# EAGLE board Control PCB v46 (EAGLE 9.7.0)
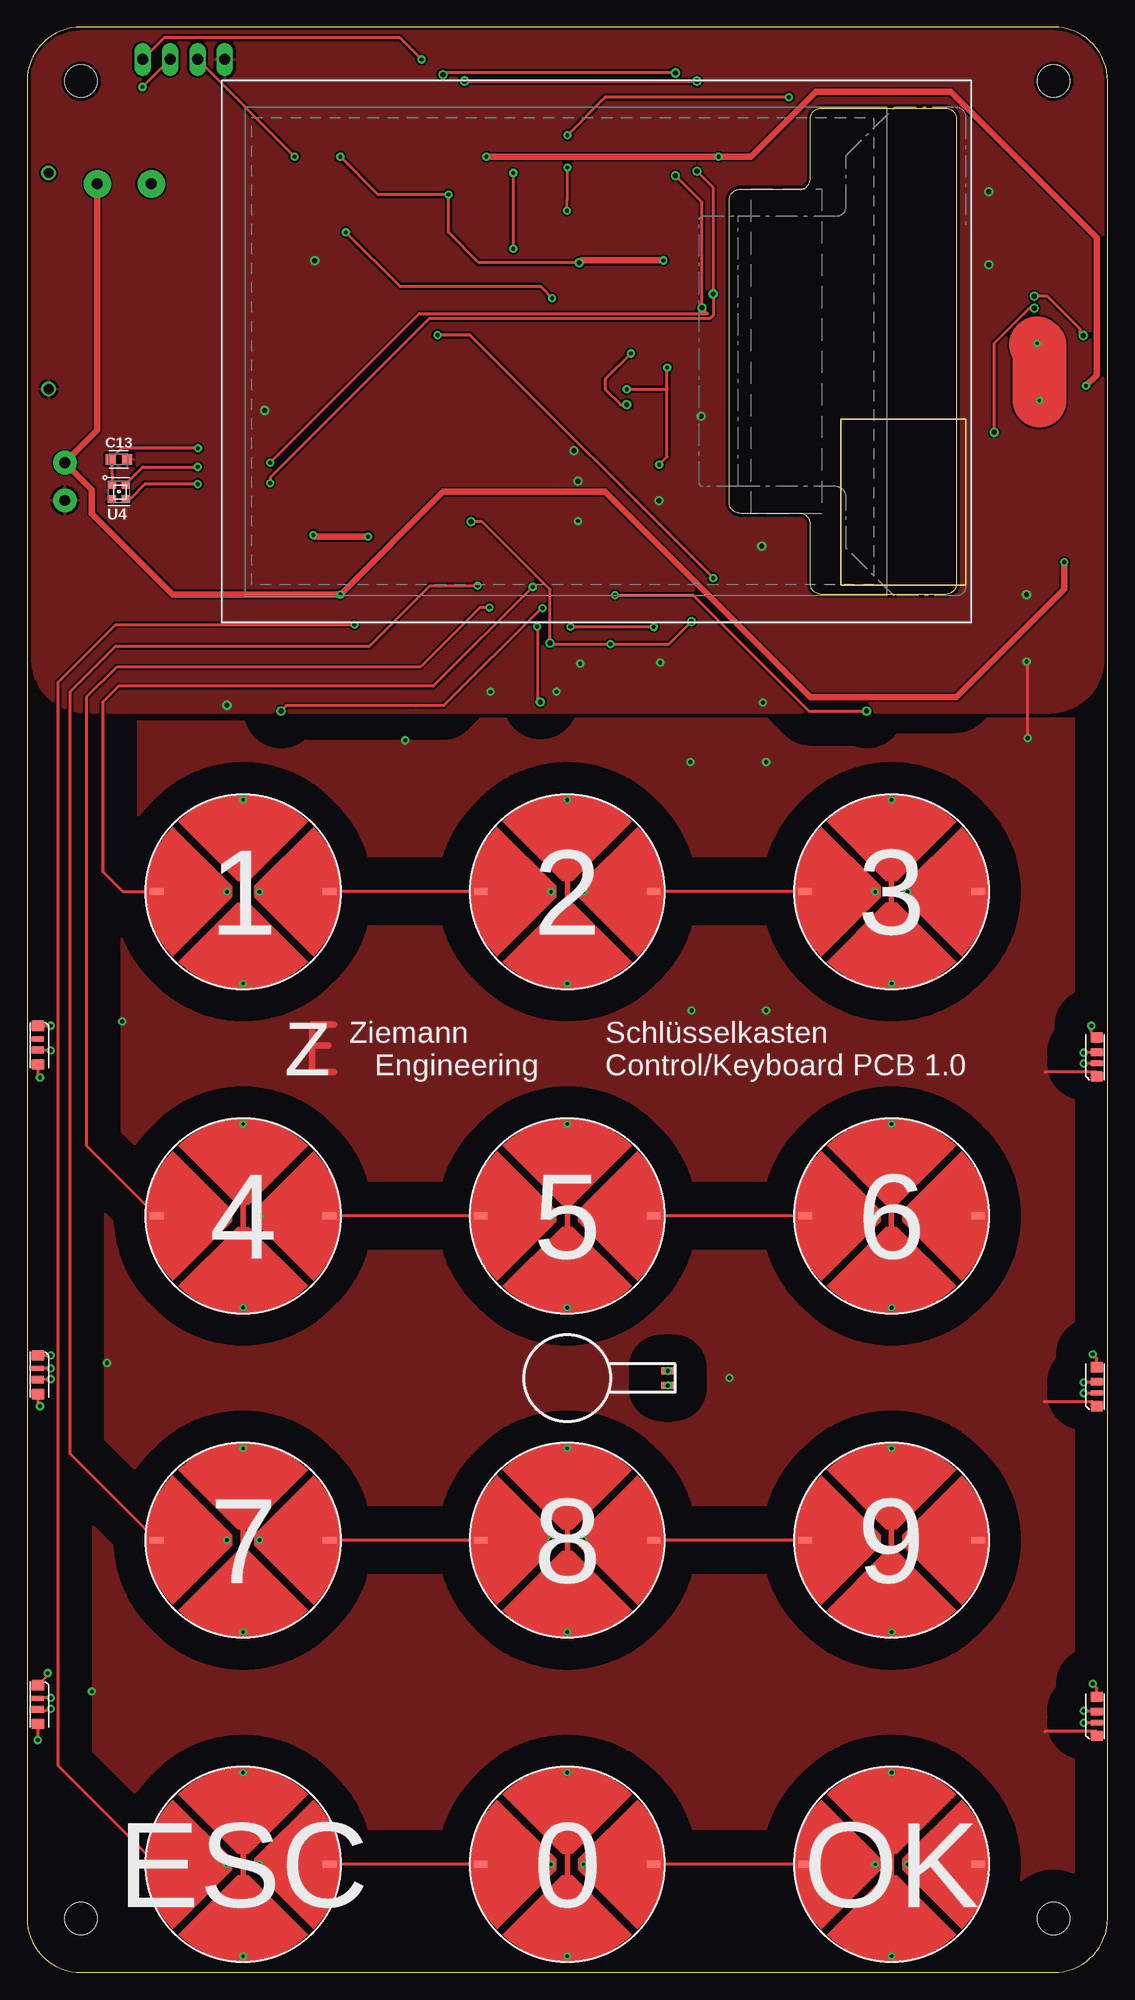
[diagram p0: board, top side]
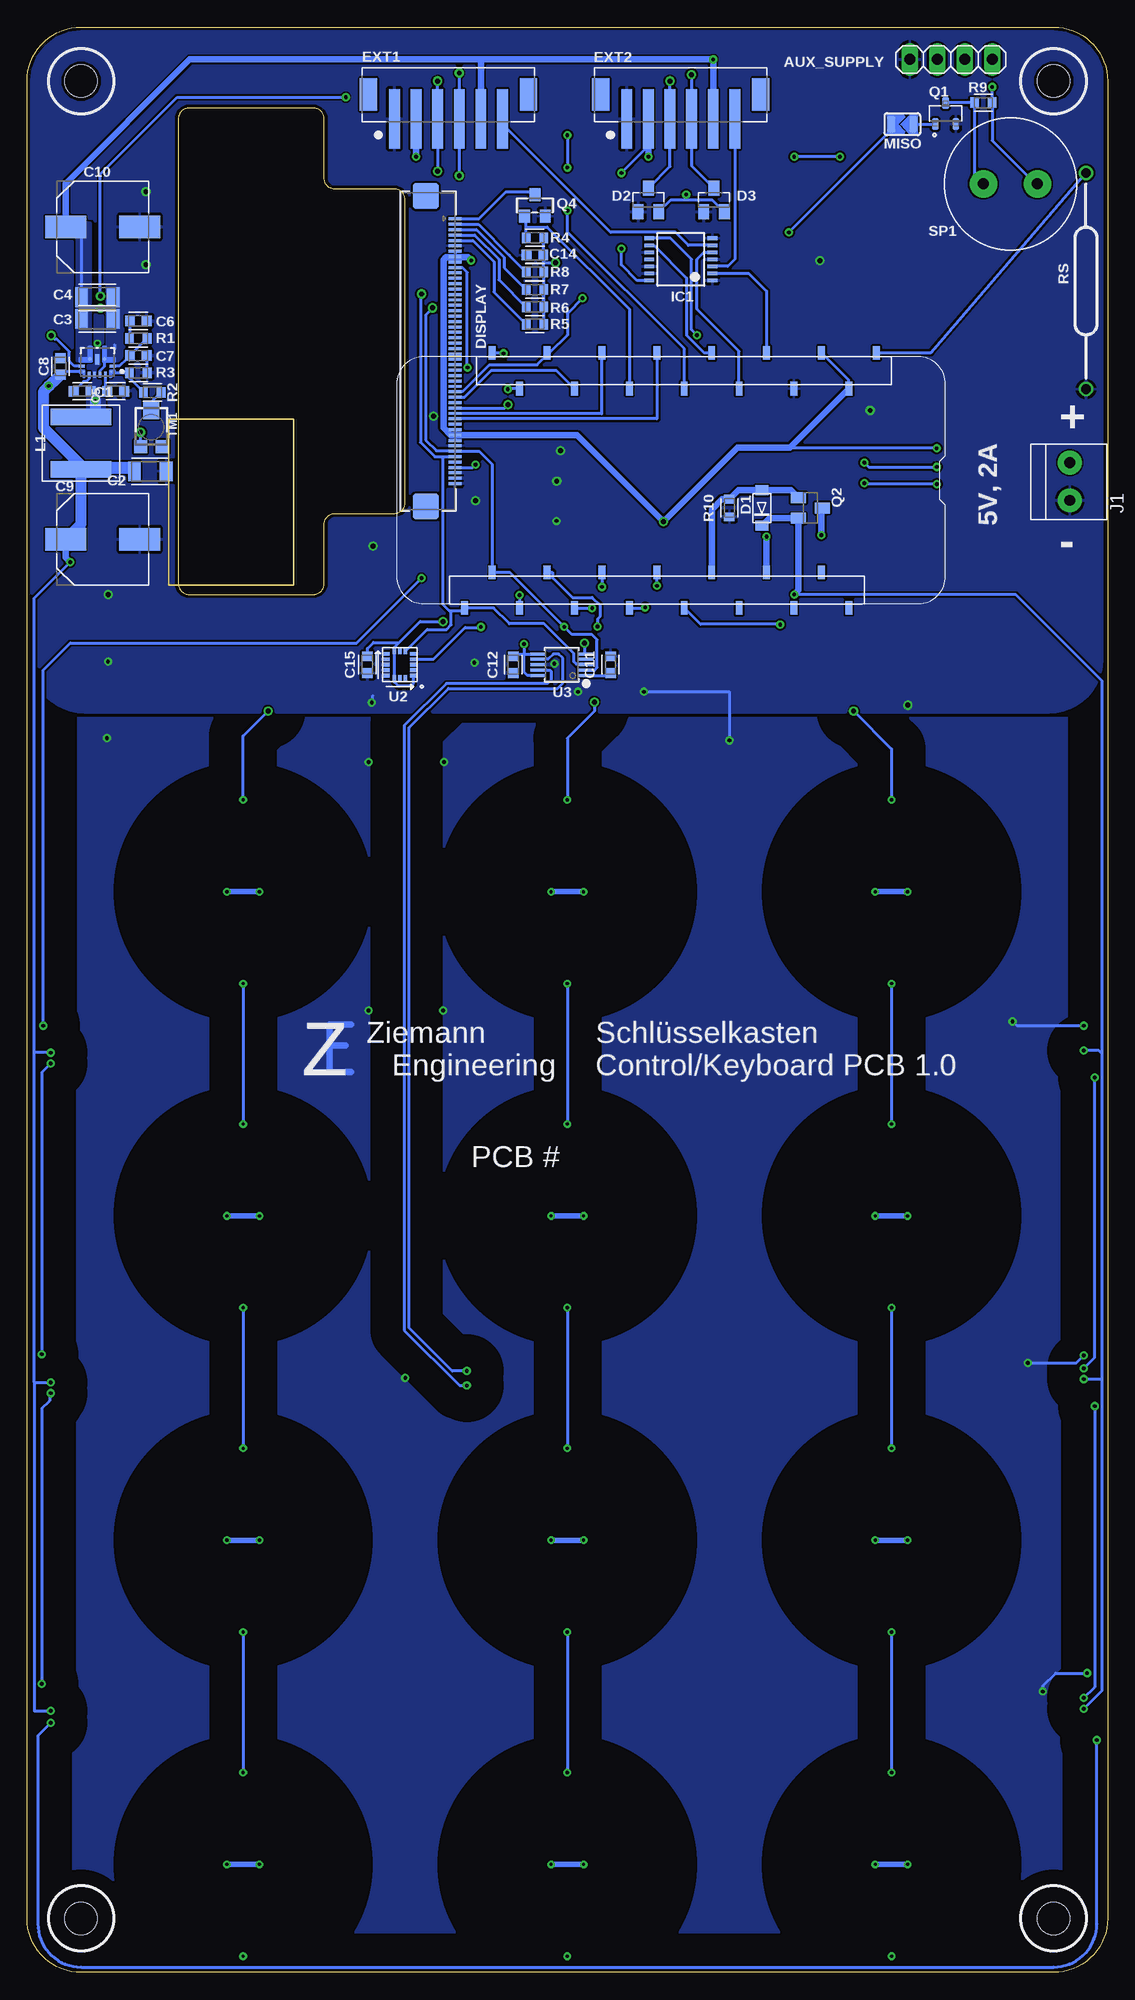
[diagram p1: board, bottom side, seen from below]

Size 100 x 180 mm. Coordinates in mm from the lower left corner, seen from the top.
Outline: 0,175 0,5 arc90 5,0 95,0 arc90 100,5 100,175 arc90 95,180 5,180 arc90 0,175
Outline: 65,136 65,164 arc-90 66,165 71.5,165 arc90 72.5,166 72.5,171.5 arc-90 73.5,172.5 85,172.5 arc-90 86,171.5 86,128.5 arc-90 85,127.5 73.5,127.5 arc-90 72.5,128.5 72.5,134 arc90 71.5,135 66,135 arc-90 65,136
Copper layers (1*16): Top / Bottom
Stack-up Default Layer Stack: Top User Defined 0.035mm / Dielectric-1 User Defined 1.5mm / Bottom User Defined 0.035mm
Design rules "aisler_2_layer_simple *": minimum track width 0.2mm, minimum drill 0.3mm, track to track 0.175mm, track to pad 0.175mm, pad to pad 0.175mm, via to via 0.175mm, smd to smd 0.175mm, copper to edge 0.3mm, drill to drill 0.25mm, minimum pad ring 0.2mm, minimum via ring 0.2mm, stop-mask expansion 0mil, vias tented up to drill 0mil, thermal gap 10mil
Holes 3 mm at 95,175 95,5 5,5 5,175
bRestrict: area 76,96 to 84,104; area 46,96 to 54,104; area 16,96 to 24,104; area 76,66 to 84,74; area 46,66 to 54,74; area 16,66 to 24,74; area 76,36 to 84,44; area 46,36 to 54,44; area 16,36 to 24,44; area 76,6 to 84,14; area 46,6 to 54,14; area 16,6 to 24,14

## Footprints (pad centres in the part's own frame; a part is rotated, then mirrored left to right if it is on the bottom)
TOUCH_MATRIX_BUTTON = smd 1.27 x 0.635: A -8,0; A' 8,0 | drill 0.3 pad 0.254: B 0,8.5; B' 0,-8.5; B'' -1.5,0; B''' 1.5,0
1X04 = drill 1.016 long: 1 -3.81,0; 2 -1.27,0; 3 1.27,0; 4 3.81,0
CAPC1608X85 = smd 0.921 x 0.97: 1 -0.775,0; 2 0.775,0
CAPC3216X135 = smd 1.165 x 1.815: 1 -1.475,0; 2 1.475,0
CAPAE830X1050N = smd 3.764 x 2.115: 1 -3.426,0; 2 3.426,0
SOD-123FL = smd 0.91 x 1.22: A 1.637,0; C -1.637,0
SOT23 = smd 1 x 1.4: 1 -0.95,-1.1; 2 0.95,-1.1; 3 0,1.1
TFT_2.83IN_240X320_50PIN = smd 0.275 x 1.2 bottom: 1 12.25,-10.39; 2 11.75,-10.39; 3 11.25,-10.39; 4 10.75,-10.39; 5 10.25,-10.39; 6 9.75,-10.39; 7 9.25,-10.39; 8 8.75,-10.39; 9 8.25,-10.39; 10 7.75,-10.39; 11 7.25,-10.39; 12 6.75,-10.39; 13 6.25,-10.39; 14 5.75,-10.39; 15 5.25,-10.39; 16 4.75,-10.39; 17 4.25,-10.39; 18 3.75,-10.39; 19 3.25,-10.39; 20 2.75,-10.39; 21 2.25,-10.39; 22 1.75,-10.39; 23 1.25,-10.39; 24 0.75,-10.39; 25 0.25,-10.39; 26 -0.25,-10.39; 27 -0.75,-10.39; 28 -1.25,-10.39; 29 -1.75,-10.39; 30 -2.25,-10.39; 31 -2.75,-10.39; 32 -3.25,-10.39; 33 -3.75,-10.39; 34 -4.25,-10.39; 35 -4.75,-10.39; 36 -5.25,-10.39; 37 -5.75,-10.39; 38 -6.25,-10.39; 39 -6.75,-10.39; 40 -7.25,-10.39; 41 -7.75,-10.39; 42 -8.25,-10.39; 43 -8.75,-10.39; 44 -9.25,-10.39; 45 -9.75,-10.39; 46 -10.25,-10.39; 47 -10.75,-10.39; 48 -11.25,-10.39; 49 -11.75,-10.39; 50 -12.25,-10.39 | smd 2.4 x 2.4 bottom: PAD1 14.35,-13.09; PAD2 -14.35,-13.09
JST_B6B-PH-SM4-TB(LF)(SN) = smd 1 x 5.5: 1 -5,0; 2 -3,0; 3 -1,0; 4 1,0; 5 3,0; 6 5,0 | smd 1.6 x 3: P1 -7.4,2.25; P2 7.4,2.25
TSSOP14 = smd 0.35 x 0.9: 1 -1.95,-2.925; 2 -1.3,-2.925; 3 -0.65,-2.925; 4 0,-2.925; 5 0.65,-2.925; 6 1.3,-2.925; 7 1.95,-2.925; 8 1.95,2.925; 9 1.3,2.925; 10 0.65,2.925; 11 0,2.925; 12 -0.65,2.925; 13 -1.3,2.925; 14 -1.95,2.925
1X2-3.5MM = drill 1 pad 2.184: 1 1.8,0; 2 -1.7,0
INDM7269X280 = smd 1.55 x 5.6: 1 -2.438,0; 2 2.438,0
4020 = smd 1 x 1.2: DIN 0,0; GND 3.6,0 | smd 0.45 x 1.2: DOUT 2.375,0 | smd 0.7 x 1.2: VDD 1.35,0
FEATHERWING_SMD = smd 0.635 x 1.27: P$1 6.4,-0.35; P$2 8.94,2.95; P$3 11.48,-0.35; P$4 14.02,2.95; P$5 16.56,-0.35; P$6 19.1,2.95; P$7 21.64,-0.35; P$8 24.18,2.95; P$9 26.72,-0.35; P$10 29.26,2.95; P$11 31.8,-0.35; P$12 34.34,2.95; P$13 36.88,-0.35; P$14 39.42,2.95; P$15 41.96,-0.35; P$17 44.5,23.25; P$18 41.96,19.95; P$19 39.42,23.25; P$20 36.88,19.95; P$21 34.34,23.25; P$22 31.8,19.95; P$23 29.26,23.25; P$24 26.72,19.95; P$25 24.18,23.25; P$26 21.64,19.95; P$27 19.1,23.25; P$28 16.56,19.95; P$29 14.02,23.25; P$30 11.48,19.95; P$31 8.94,23.25
SOLDERJUMPER_ARROW_NOPASTE = smd 0.762 x 1.524: 1 -1.016,0; 2 1.016,0
SOT23-3 = smd 0.62 x 1.1: 1 -0.95,-0.975; 2 0.95,-0.975; 3 0,0.975
SOT23-WIDE = smd 1 x 1.2: 1 -0.95,-1; 2 0.95,-1; 3 0,1
RESC1608X60 = smd 0.799 x 0.974: 1 -0.815,0; 2 0.815,0
AXIAL_20MM = drill 0.9: P$1 -10,0; P$2 10,0
PS12 = drill 1 pad 2.54: P$1 -2.5,0; P$2 2.5,0
TC33X = smd 1.2 x 1.2: 1 -1,-1.825; 3 1,-1.825 | smd 1.5 x 1.6: 2 0,1.5
RQQ0011A-MFG = smd 0.241 x 0.241: 1 -1.269,0.894; 7 1.269,0.894 | smd 0.55 x 0.25: 2 -1.425,0.375; 6 1.425,0.375 | smd 0.37 x 0.37: 3 -0.684,-0.278; 5 0.684,-0.278 | smd 0.4 x 1: 4 0,-0.25 | smd 0.25 x 0.55: 8 0.75,1.175; 9 0.25,1.175; 10 -0.25,1.175; 11 -0.75,1.175
LGA-16 = smd 0.52 x 0.35: 1 -1.225,1; 2 -1.225,0.5; 3 -1.225,0; 4 -1.225,-0.5; 5 -1.225,-1; 9 1.225,-1; 10 1.225,-0.5; 11 1.225,0; 12 1.225,0.5; 13 1.225,1 | smd 0.35 x 0.52: 6 -0.5,-1.225; 7 0,-1.225; 8 0.5,-1.225; 14 0.5,1.225; 15 0,1.225; 16 -0.5,1.225
PSOP10 = smd 0.28 x 1.45: 1 -1,-2.2; 2 -0.5,-2.2; 3 0,-2.2; 4 0.5,-2.2; 5 1,-2.2; 6 1,2.2; 7 0.5,2.2; 8 0,2.2; 9 -0.5,2.2; 10 -1,2.2
LTR-329 = smd 0.7 x 0.75: 1 -0.6,0.675; 2 -0.6,-0.675; 3 0.6,-0.675; 4 0.6,0.675
VG0832014L = smd 0.655 x 1.2: P$1 -0.672,-9.3; P$2 0.672,-9.3

## Placement (x,y rotation side)
0  TOUCH_MATRIX_BUTTON  [TOUCH_MATRIX_BUTTON]  50,10 0 top
1  TOUCH_MATRIX_BUTTON  [TOUCH_MATRIX_BUTTON]  20,100 0 top
2  TOUCH_MATRIX_BUTTON  [TOUCH_MATRIX_BUTTON]  50,100 0 top
3  TOUCH_MATRIX_BUTTON  [TOUCH_MATRIX_BUTTON]  80,100 0 top
4  TOUCH_MATRIX_BUTTON  [TOUCH_MATRIX_BUTTON]  20,70 0 top
5  TOUCH_MATRIX_BUTTON  [TOUCH_MATRIX_BUTTON]  50,70 0 top
6  TOUCH_MATRIX_BUTTON  [TOUCH_MATRIX_BUTTON]  80,70 0 top
7  TOUCH_MATRIX_BUTTON  [TOUCH_MATRIX_BUTTON]  20,40 0 top
8  TOUCH_MATRIX_BUTTON  [TOUCH_MATRIX_BUTTON]  50,40 0 top
9  TOUCH_MATRIX_BUTTON  [TOUCH_MATRIX_BUTTON]  80,40 0 top
AUX_SUPPLY  PINHD-1X4  [1X04]  14.5,177 180 bottom
C1  100n  [CAPC1608X85]  94.9,146.3 0 bottom
C2  10u  [CAPC3216X135]  88.6,138.9 0 bottom
C3  10u  [CAPC3216X135]  93.5,153 0 bottom
C4  10u  [CAPC3216X135]  93.5,155 0 bottom
C5  2.2u  [CAPC1608X85]  91.8,146.3 180 bottom
C6  39n  [CAPC1608X85]  89.7,152.8 180 bottom
C7  82p  [CAPC1608X85]  89.7,149.6 180 bottom
C8  100n  [CAPC1608X85]  96.9,148.6 270 bottom
C9  [CAPAE830X1050N]  93,132.6 0 bottom
C10  [CAPAE830X1050N]  93,161.5 0 bottom
C11  1u  [CAPC1608X85]  46,121 90 bottom
C12  1u  [CAPC1608X85]  55,121 90 bottom
C13  100n  [CAPC1608X85]  8.5,140 180 top
C14  100n  [CAPC1608X85]  53,158.9 0 bottom
C15  100n  [CAPC1608X85]  68.5,121 90 bottom
D1  [SOD-123FL]  32,135.5 90 bottom
D2  BAT54S  [SOT23]  42.5,164 0 bottom
D3  BAT54S  [SOT23]  36.42,164 0 bottom
DISPLAY  2.8" CTP ILI9341  [TFT_2.83IN_240X320_50PIN]  50,150 90 top
ESC  TOUCH_MATRIX_BUTTON  [TOUCH_MATRIX_BUTTON]  20,10 0 top
EXT1  B6B-PH-SM4-TB(LF)(SN)  [JST_B6B-PH-SM4-TB(LF)(SN)]  61,171.5 0 bottom
EXT2  B6B-PH-SM4-TB(LF)(SN)  [JST_B6B-PH-SM4-TB(LF)(SN)]  39.5,171.5 0 bottom
IC1  74ABT125PW  [TSSOP14]  39.5,158.5 90 bottom
J1  1X2-3.5MM  [1X2-3.5MM]  3.5,138 270 bottom
L1  [INDM7269X280]  95,141.5 90 bottom
LED1  SK6812  [4020]  99,86.5 270 top
LED2  SK6812  [4020]  99,56 270 top
LED3  SK6812  [4020]  99,25.5 270 top
LED4  SK6812  [4020]  1,23 90 top
LED5  SK6812  [4020]  1,53.5 90 top
LED6  SK6812  [4020]  1,84 90 top
MCU  FEATHERSMD  [FEATHERWING_SMD]  15,149.5 180 bottom
MISO  [SOLDERJUMPER_ARROW_NOPASTE]  19,171 180 bottom
OK  TOUCH_MATRIX_BUTTON  [TOUCH_MATRIX_BUTTON]  80,10 0 top
Q1  MOSFET-N  [SOT23-3]  15,172 0 bottom
Q2  PMOSFET  [SOT23]  27.5,135.5 270 bottom
Q4  BSS138  [SOT23-WIDE]  53,163.5 0 bottom
R1  36k  [RESC1608X60]  89.7,151.2 0 bottom
R2  91k  [RESC1608X60]  88.4,146.2 0 bottom
R3  10k  [RESC1608X60]  89.7,148 180 bottom
R4  10k  [RESC1608X60]  53,160.5 0 bottom
R5  10  [RESC1608X60]  53,152.5 0 bottom
R6  10  [RESC1608X60]  53,154.1 0 bottom
R7  10  [RESC1608X60]  53,155.7 0 bottom
R8  10  [RESC1608X60]  53,157.33 0 bottom
R9  1k  [RESC1608X60]  11.5,173 0 bottom
R10  100k  [RESC1608X60]  35,135.5 90 bottom
RS  REEDSWITCH  [AXIAL_20MM]  2,156.5 90 bottom
SP1  SPEAKER/PS12  [PS12]  9,165.5 180 bottom
TM1  200k  [TC33X]  88.5,143 0 bottom
U1  TPS61288RQQRRQQ0011A-MFG  [RQQ0011A-MFG]  93.5,149 180 bottom
U2  LIS3DHTR  [LGA-16]  65.5,121 180 bottom
U3  DRV2605LDGS  [PSOP10]  50.5,121 90 bottom
U4  LTR-329  [LTR-329]  8.5,137 0 top
U$2  VIBRATION_MOTOR  [VG0832014L]  50,55 90 top
U$3  [ZELOGO_NAME]  26.5,83 0 top
U$4  [ZELOGO_NAME]  71.9,83 0 bottom

## Library data of the parts
0 1-9 ESC L1 LED1-LED6 MCU OK RS U$2 U$4 = ZE PCB lib v51
AUX_SUPPLY = MAS AT PCB library; CATEGORY: CONNECTOR; SUB-CATEGORY: PIN-HEADER
C1-C15 = Capacitor; CATEGORY: Capacitor
D1 J1 SP1 = adafruit
D2 D3 = diode
DISPLAY Q4 U3 = microbuilder
EXT1 EXT2 = B6B-PH-SM4-TB_LF__SN_; MANUFACTURER: JST
IC1 = 74xx-eu
MISO = microbuilder; BOM: EXCLUDE
Q1 = MAS AT PCB library; CREATED_BY: PCBLayout.com; DIGIKEY_PART_NUMBER: 1727-2764-1-ND; MANUFACTURER: Nexperia USA Inc.; MPN: 2N7002,215; PACKAGE: SOT-23-3
Q2 = Transistor; CATEGORY: Transistor; SUB-CATEGORY: MOSFET; TYPE: P-Channel
R1-R10 = Resistor; CATEGORY: Resistor; SUB-CATEGORY: Fixed
TM1 = MAS AT PCB library v11
U1 = 2023-08-09_12-29-33_Library; COPYRIGHT: Copyright (C) 2023 Ultra Librarian. All rights reserved.; DIGI-KEY_PART_NUMBER_1: 296-TPS61288RQQRCT-ND; DIGI-KEY_PART_NUMBER_2: 296-TPS61288RQQRDKR-ND; DIGI-KEY_PART_NUMBER_3: 296-TPS61288RQQRTR-ND; MANUFACTURER_PART_NUMBER: TPS61288RQQR; MFR_NAME: Texas Instruments; REFDES: RefDes; TYPE: TYPE
U2 = MAS AT PCB library; CREATED_BY: PCBLayout.com; DIGIKEY_PN: 497-10613-2-ND; MANUFACTURER: STMicroelectronics; MPN: LIS3DHTR; PACKAGE: LGA-16
U4 = adafruit_sensor
U$3 = ZE PCB lib

## Nets
3V3: AUX_SUPPLY.3 C12.2 C13.2 C14.2 C15.2 D2.2 D3.2 DISPLAY.7 DISPLAY.8 DISPLAY.9 DISPLAY.40 DISPLAY.41 DISPLAY.42 MCU.P$2 MCU.P$3 R4.2 R5.2 R6.2 R7.2 R8.2 U2.1 U2.8 U2.14 U3.5 U3.6 U3.10 U4.1
5V: AUX_SUPPLY.2 C2.1 C8.2 C9.1 D1.C EXT1.2 EXT2.2 IC1.14 J1.2 L1.1 LED1.VDD LED2.VDD LED3.VDD LED4.VDD LED5.VDD LED6.VDD Q2.2 R9.2 SP1.P$1 U1.7
12V: AUX_SUPPLY.1 C3.1 C4.1 C10.1 EXT1.5 EXT2.5 TM1.1 U1.5
12V_EN: MCU.P$8 U1.6
ACC_INT: U2.11
GND: AUX_SUPPLY.4 C2.2 C3.2 C4.2 C5.1 C6.1 C7.1 C8.1 C9.2 C10.2 C11.2 C12.1 C13.1 C14.1 C15.1 D2.1 D3.1 DISPLAY.6 DISPLAY.43 DISPLAY.48 DISPLAY.49 DISPLAY.50 EXT1.1 EXT2.1 IC1.1 IC1.4 IC1.7 IC1.10 IC1.12 IC1.13 J1.1 LED1.GND LED2.GND LED3.GND LED4.GND LED5.GND LED6.GND MCU.P$4 Q1.2 Q4.2 R3.1 R10.1 RS.P$1 U1.3 U1.10 U2.5 U2.10 U2.12 U3.8 U4.2
IN/TRIG: U3.4
LCD_CS: DISPLAY.38 MCU.P$9
LCD_DC: DISPLAY.36 MCU.P$15
LCD_LITE: MCU.P$10 Q4.1 R4.1
LCD_RST: DISPLAY.10 DISPLAY.47 MCU.P$14
LED1: IC1.2 MCU.P$5
LED1_5V: EXT2.6 IC1.3
LED2: IC1.5 MCU.P$6
LED2_5V: EXT1.6 IC1.6
LED3: IC1.9 MCU.P$7
LED3_5V: IC1.8 LED1.DIN
MCU_RESET: MCU.P$1 RS.P$2
MISO: DISPLAY.33 MCU.P$13 MISO.2
MOSI: DISPLAY.34 MCU.P$12
N$1: 7.A' 8.A
N$2: DISPLAY.5 R5.1
N$3: DISPLAY.2 R8.1
N$4: C1.1 U1.8
N$5: C5.2 U1.11
N$6: C6.2 R1.1
N$7: C1.2 L1.2 U1.4 U1.9
N$8: DISPLAY.3 R7.1
N$9: C7.2 R1.2 U1.2
N$10: DISPLAY.4 R6.1
N$11: R2.2 TM1.2
N$12: R2.1 R3.2 U1.1
N$13: DISPLAY.1 Q4.3
N$14: 8.A' 9.A
N$15: 4.A' 5.A
N$16: 5.A' 6.A
N$17: 4.B' 7.B
N$18: 7.B' ESC.B
N$19: 5.B' 8.B
N$20: 1.A' 2.A
N$21: 2.A' 3.A
N$22: 0.B 8.B'
N$23: 6.B' 9.B
N$24: 9.B' OK.B
N$25: 0.A ESC.A'
N$26: 0.A' OK.A
N$27: 1.B' 4.B
N$28: 2.B' 5.B
N$29: 3.B' 6.B
N$30: C11.1 U3.1
N$31: U3.9 U$2.P$1
N$32: LED1.DOUT LED2.DIN
N$33: U3.7 U$2.P$2
N$34: LED5.DOUT LED6.DIN
N$35: LED4.DOUT LED5.DIN
N$36: LED2.DOUT LED3.DIN
N$37: LED3.DOUT LED4.DIN
N$38: Q1.3 R9.1 SP1.P$2
N$39: MISO.1 Q1.1
SCK: DISPLAY.37 MCU.P$11
SCL: D3.3 DISPLAY.44 EXT1.4 EXT2.4 MCU.P$18 U2.4 U3.2 U4.4
SDA: D2.3 DISPLAY.45 EXT1.3 EXT2.3 MCU.P$17 U2.6 U3.3 U4.3
TOUCH_5: 3.B MCU.P$19
TOUCH_6: 2.B MCU.P$20
TOUCH_9: 1.B MCU.P$21
TOUCH_10: 1.A MCU.P$22
TOUCH_11: 4.A MCU.P$23
TOUCH_12: 7.A MCU.P$24
TOUCH_13: ESC.A MCU.P$25
TOUCH_IRQ: DISPLAY.46
V_BAT: MCU.P$28 Q2.3
V_BUS: D1.A MCU.P$26 Q2.1 R10.2

## Tracks (layer width: path | path; a pad name or v marks a point on that pad's centre or on a via)
3V3  (via drill 0.35, 0.45 pad 0.55)
  Top 0.3: v61.5,125 59.4,122.9 v54,122.9 48.5,122.9 v48.4,123 48.4,127.95 42.1,134.25 v41.1,134.25 | AUX_SUPPLY.3 v24.77,168 | v29,168 32.5,164.5 v39,164.5 39,161 41.8,158.2 v51.1,158.2 | v15.82,141.02 8.75,141.02 C13.2 7.9,139.82 7.9,138.62 7.9,138.5 U4.1
  Top 0.6: v51.1,158.2 51.3,158.41 v58.9,158.41
  Top 0.61: v51.1,158.2 v51.1,158.21
  Bottom 0.3: 52.19,158.2 R8.2 R7.2 | DISPLAY.7 DISPLAY.8 DISPLAY.9 | DISPLAY.40 DISPLAY.41 DISPLAY.42 | v48.4,123 48.4,122.1 U3.5 | R7.2 52.19,155.5 | C12.2 54.77,122 54,122 | 54,122 U3.6 | v54,122.9 54,122 | U3.10 53.7,120 54,120.3 54,122 | MCU.P$3 23.99,147.36 23.99,146.73 23.94,146.68 MCU.P$2 | 65.56,123.06 66,122.61 U2.8 U2.14 66,119.39 65.61,119 64.5,119 64.28,119.22 U2.1 | 65.56,123.06 63.61,125 v61.5,125 | 52.19,158.2 R4.2 | 52.19,158.2 v51.1,158.2 | R7.2 R5.2 | R6.2 R7.2 | 29.39,141.1 15.82,141.1 v15.82,141.02 | v24.77,168 v29,168 | C15.2 68.5,122.5 67.94,123.06 65.56,123.06 | C14.2 52.23,158.24 52.19,158.2 | D3.2 36.58,164 39,164 | 39,164 40.45,164 D2.2 | 39,164 v39,164.5
  Bottom 0.6: MCU.P$2 29.39,141.1 34.25,141.1 v41.1,134.25 49.1,142.25 DISPLAY.41 60.79,142.25 61.47,142.92 61.47,158.44 61.2,158.7 60.44,158.7 DISPLAY.8 60.34,158.7 59.19,158.7 v58.9,158.41
5V  (via drill 0.35)
  Top 0.3: LED4.VDD 1.54,24.21 v2.2,24.4 | v97.8,54.6 98.95,54.6 LED2.VDD | LED1.VDD 98.97,85.12 98.89,85.1 v97.8,85.1 | v97.8,24.2 98.98,24.2 LED3.VDD | v2.2,85.3 1,85.3 LED6.VDD | LED5.VDD 1.05,54.9 v2.2,54.9 | AUX_SUPPLY.2 v10.69,174.46 | v45,159.5 v45,166.5
  Top 0.6: v96,130.5 96,128 86,118 72.5,118 53.5,137 38.5,137 v29,127.5 13.5,127.5 6,135 6,137.2 J1.2 6.5,142.7 SP1.P$1 | v42.5,168 v64,168 67,168 73,174 85.5,174 99,160.5 99,147.8 v98,146.8
  Bottom 0.3: U1.7 96.62,148.11 C8.2 | C2.1 90.08,138.97 90.3,139.2 90.4,139.3 | v2.2,24.4 0.5,26.1 0.5,54.9 | 0.5,54.9 0.5,85 | 0.5,85 0.5,119.5 8.5,127.5 v29,127.5 | v96,130.5 99.33,127.17 99.33,85.1 | v97.8,85.1 99.33,85.1 | 99.33,54.6 99.33,24.2 v97.8,24.2 | 99.33,54.6 v97.8,54.6 | 99.33,54.6 99.33,85.1 | 0.5,85 0.8,85.3 v2.2,85.3 | v2.2,54.9 0.5,54.9 | SP1.P$1 6.68,165.54 6.68,165.5 10.69,169.5 R9.2 v10.69,174.46 | IC1.14 43.55,156.55 45,158 v45,159.5 | v45,166.5 42.5,169 EXT2.2
  Bottom 0.6: D1.C 31.31,134.55 Q2.2 28.6,127.9 v29,127.5 | C9.1 96.43,130.93 v96,130.5 | EXT2.2 v42.5,168 | v64,168 EXT1.2
  Bottom 1.016: C9.1 95,134.03 L1.1 94.86,139.2 90.3,139.2 | v98,146.8 97.92,146.8 C8.2 98.48,146.24 98.48,142.93 94.86,139.3 90.4,139.3
12V  (via drill 0.35, 0.45 pad 0.55)
  Top 0.3: v89.5,142.5 89.5,150.75 92.75,154 v93.21,154 | v36.5,177 34.5,179 12.69,179 AUX_SUPPLY.1
  Bottom 0.3: TM1.1 v89.5,142.5 | 95,154 v93.21,154 | C4.1 94.97,160.47 96,161.5 C10.1
  Bottom 0.6: C10.1 96.43,165.5 84.93,177 58,177 | 58,177 v36.5,177 EXT2.5 | EXT1.5 58,177
  pour Bottom (no thermals): 95.5,149 95.5,162 94,162 94,149
12V_EN  (via drill 0.35, 0.45 pad 0.55)
  Top 0.3: v93.21,155.1 94.4,155.1 97.4,152.1 97.4,151.81 v97.75,151.46 | v70.5,173.5 53.5,173.5 v50,170 | v50,167 50,164.02 49.98,164.01 v49.98,162.99
  Bottom 0.3: U1.6 95.62,148.62 96.09,149.09 96.09,149.94 97.25,151.1 97.39,151.1 v97.75,151.46 | v93.21,155.1 93.21,166.38 86.09,173.5 v70.5,173.5 | v50,170 v50,167 | MCU.P$8 39.18,150.22 49.98,161.01 v49.98,162.99
GND  (via drill 0.35, 0.45 pad 0.55)
  Top 0.3: LED1.GND 99,83.3 94.2,83.3 | LED2.GND 98.6,52.8 94.12,52.8 | LED3.GND 98.99,22.3 94.2,22.3 | LED6.GND v2.2,87.6 | LED5.GND v2.2,57.1 | v1.9,27.7 1.9,27.5 LED4.GND | v92.5,121.3 92.6,121.3 92.6,114.1
  Top 0.6: 26.4,85.75 26.4,87.7 28.4,87.7 | 26.4,85.75 26.4,83.3 28.4,83.3 | 26.4,85.75 27.9,85.75
  Bottom 0.3: R3.1 88.89,149.56 C7.1 | 91.9,150.6 91.9,150.19 | U1.10 93.22,147.85 93.22,148.21 92.82,148.62 U1.3 | C3.2 C4.2 | 36.52,118.48 36.5,118.5 | v8.8,88 8.4,87.6 v2.2,87.6 | v7.4,56.4 2.9,56.4 v2.2,57.1 | v6,26 6,26.5 4.8,27.7 v1.9,27.7 | 68,117.5 68,118.12 | v42.9,118.5 35,118.5 v35,114
  Bottom 0.6: 72,87.73 72,87.7 | 72,87.7 72,85.75 | 72,85.75 72,83.3 70,83.3 | 72,87.7 70,87.7 | 72,85.75 70.5,85.75
  other vias: 26.63,158.37 51.2,121.1 58.6,121.2 92.5,127.5 51,134.3 89,158 49,118.5 68.1,117.5 89,164.75 67.98,131.98 50.98,137.98 21.98,144.52 18.5,117.25 58.48,136.18 92.6,114.2 61.5,89 68.4,89 65,55 61.4,112 68.4,112 62.37,144 50.62,140.82
  pour Top: 0.4,182.46 0.4,121.5 arc90 5.4,116.5 94.7,116.5 arc90 99.7,121.5 99.7,182.3 0.67,182.3 arc90
  pour Bottom (rank 3): 99.7,182.5 0.4,182.5 0.4,121.5 arc90 5.4,116.5 94.7,116.5 arc90 99.7,121.5
  pour Top (isolate 3): -4.5,116 100.5,116 100.5,1 97.5,-2 0.5,-2 -3.5,2 -3.5,115.5 -4,116
  pour Bottom (isolate 3): -1,116 104.5,116 110,110.5 110,3.5 104,-2.5 -6.5,-2.5 -10,-6 -10,113 -4,119
  pour Bottom (no thermals): 92.7,156.5 92.7,149 91,149 91,156.5
LCD_CS
  Bottom 0.3: MCU.P$9 41.72,143.75 DISPLAY.38
LCD_DC  (via drill 0.35, 0.45 pad 0.55)
  Top 0.3: v55.9,149.8 53.5,147.4 53.5,146.5 54.95,145.05 v55.5,145.05
  Bottom 0.3: v55.5,145.05 55.8,144.75 DISPLAY.36 | MCU.P$15 55.95,149.85 v55.9,149.8
LCD_LITE
  Bottom 0.3: Q4.1 53.85,162.4 53.85,160.5 R4.1 53.81,161.5 51.86,161.5 44.26,153.9 MCU.P$10
LCD_RST  (via drill 0.35)
  Top 0.3: v55.5,146.5 59.24,146.5 | 59.24,146.5 59.24,140.24 v58.5,139.5 | 59.24,146.5 59.24,146.56 v59.24,148.5
  Bottom 0.3: DISPLAY.10 59.7,157.75 59.27,157.31 59.27,148.5 v59.24,148.5 | DISPLAY.47 58.75,139.25 v58.5,139.5 | v55.5,146.5 55.45,146.55 MCU.P$14
LED1
  Bottom 0.3: IC1.2 33.2,157.2 31.56,155.56 MCU.P$5
LED1_5V
  Bottom 0.3: EXT2.6 34.5,158.5 35.15,157.85 IC1.3
LED2
  Bottom 0.3: MCU.P$6 34.1,150 38,153.9 38,158.5 37.35,159.15 IC1.5
LED2_5V
  Bottom 0.3: IC1.6 38.8,159.8 40,161 46,161 56,171 EXT1.6
LED3
  Bottom 0.3: IC1.9 42,159.8 38.98,156.77 38.98,151.49 37.34,149.85 MCU.P$7
LED3_5V  (via drill 0.35)
  Top 0.3: LED1.DIN 98.5,87 v98.5,87.6 | v63.5,129 41,151.5 v38,151.5
  Bottom 0.3: v98.5,87.6 98.5,120.5 96,123 69.5,123 v63.5,129 | v38,151.5 38.5,152 38.5,158.5 40.45,160.45 IC1.8
MCU_RESET
  Bottom 0.3: MCU.P$1 16.38,149.85 RS.P$2
MISO  (via drill 0.35)
  Top 0.3: v29.5,161 34.5,156 47.5,156 v48.6,154.9
  Bottom 0.3: DISPLAY.33 60.35,146.29 59.66,146.29 57.2,148.75 52.78,148.75 51.78,149.75 MCU.P$13 51.65,149.85 50,151.5 50,153.5 v48.6,154.9 | MISO.2 20.02,170.48 v29.5,161
MOSI
  Bottom 0.3: DISPLAY.34 60.37,145.78 59.5,145.78 57.03,148.25 51.04,148.25 MCU.P$12
N$1
  Top 0.3: 8.A 7.A'
N$2
  Bottom 0.3: R5.1 56.8,155.49 56.8,158.3 58.75,160.25 DISPLAY.5
N$3
  Bottom 0.3: R8.1 55.38,158.89 55.38,158.9 58.23,161.75 DISPLAY.2
N$4
  Bottom 0.3: U1.8 94.25,147.45 94.5,147.2 94.78,147.2 C1.1
N$5
  Bottom 0.3: U1.11 92.75,146.47 C5.2
N$6
  Bottom 0.3: R1.1 90.47,151.24 C6.2
N$7  (via drill 0.3 pad 0.7)
  Top 5: 93.39,150.64 v93.49,150.74 93.69,150.54 v93.69,145.44
  Bottom 1.016: v93.69,145.44 93.69,144.19 | 93.69,144.19 93.5,144 | L1.2 93.94,143.94 93.69,144.19
  pour Bottom (rank 2, no thermals): 94.5,144 94.5,153.5 92.7,153.5 92.7,144
N$8
  Bottom 0.3: DISPLAY.3 58.4,161.25 55.85,158.7 55.85,157.74 R7.1
N$9
  Bottom 0.3: C7.2 90.79,149.29 | 90.79,149.29 91.45,148.62 U1.2 | R1.2 90.79,149.3 90.79,149.29
N$10
  Bottom 0.3: DISPLAY.4 58.57,160.75 56.33,158.5 56.33,156.61 R6.1
N$11
  Bottom 0.3: R2.2 88.5,145.28 TM1.2
N$12
  Bottom 0.3: U1.1 92.12,148 R3.2 90.52,147.5 R2.1
N$13
  Bottom 0.3: DISPLAY.1 58.19,162.25 55.69,164.75 53.25,164.75 Q4.3
N$14
  Top 0.3: 9.A 8.A'
N$15
  Top 0.3: 5.A 4.A'
N$16
  Top 0.3: 6.A 5.A'
N$17
  Bottom 0.3: 4.B' 7.B
N$18
  Bottom 0.3: 7.B' ESC.B
N$19
  Bottom 0.3: 5.B' 8.B
N$20
  Top 0.3: 2.A 1.A'
N$21
  Top 0.3: 3.A 2.A'
N$22
  Bottom 0.3: 8.B' 0.B
N$23
  Bottom 0.3: 6.B' 9.B
N$24
  Bottom 0.3: 9.B' OK.B
N$25
  Top 0.3: 0.A ESC.A'
N$26
  Top 0.3: OK.A 0.A'
N$27
  Bottom 0.3: 1.B' 4.B
N$28
  Bottom 0.3: 2.B' 5.B
N$29
  Bottom 0.3: 3.B' 6.B
N$30
  Bottom 0.3: U3.1 46.23,120 C11.1
N$31  (via drill 0.35)  (1 unrouted)
  Bottom 0.3: 51.9,120.5 U3.9 51.6,120.5 51.5,120.4 51.5,119.6 51.83,119.28 61.2,119.28 65.1,115.37 65.1,59.43 59.97,54.3 v59.3,54.3
N$32  (via drill 0.35)
  Top 0.3: LED1.DOUT 98.05,84.12 97.89,84.19 v97.8,84.1 | LED2.DIN 99,56.83 v98.62,57.2
  Bottom 0.3: v97.8,84.1 98.62,83.28 v98.62,57.2
N$33  (via drill 0.35)  (1 unrouted)
  Bottom 0.3: U3.7 51.8,121.5 51.3,122 50.8,122 50.4,121.6 50.4,119.3 50.9,118.8 61,118.8 64.62,115.17 64.62,59.62 60.65,55.65 v59.3,55.65
N$34  (via drill 0.35)
  Top 0.3: v2.2,55.9 1.02,55.9 LED5.DOUT | LED6.DIN 1,83 v1.2,82.8
  Bottom 0.3: v2.2,55.9 1.2,56.9 v1.2,82.8
N$35  (via drill 0.35)
  Top 0.3: v2.2,25.4 1.02,25.4 LED4.DOUT | LED5.DIN 1,52.6 v1.2,52.4
  Bottom 0.3: v1.2,52.4 1.2,26.4 v2.2,25.4
N$36  (via drill 0.35)
  Top 0.3: LED2.DOUT 99,53.6 v97.8,53.6 | LED3.DIN 99,26.32 v98.62,26.7
  Bottom 0.3: v97.8,53.6 97.9,53.5 97.9,52.9 98.62,52.17 v98.62,26.7
N$37  (via drill 0.35)
  Top 0.3: LED3.DOUT 99,23.1 v97.8,23.1 | LED4.DIN v1,21.5
  Bottom 0.3: v97.8,23.1 99,21.9 99,4.5 arc-90 95,0.5 5,0.5 arc-90 1,4.5 v1,21.5
N$38
  Bottom 0.3: Q1.3 14.97,173 R9.1 12.31,166.31 SP1.P$2
N$39
  Bottom 0.3: MISO.1 15.97,171 Q1.1
SCK
  Bottom 0.3: MCU.P$11 46.8,144.22 60.37,144.22 DISPLAY.37
SCL  (via drill 0.35, 0.45 pad 0.55)
  Top 0.3: v60,166.25 62.48,163.78 62.48,154 | v60,175.75 38.65,175.75 v38.5,175.6 | v58,124.5 v50.3,124.5 v50.29,124.51 | v22.5,139.7 36.3,153.5 62.98,153.5 62.48,154 | v15.8,139.3 10.72,139.3 U4.4 | 62.48,154 v62.46,154.02
  Bottom 0.3: U3.2 47.48,120.5 47.25,120.73 47.25,123.31 47.73,123.79 49.57,123.79 v50.29,124.51 55.33,129.55 MCU.P$18 56.96,139.55 58.16,140.75 DISPLAY.44 60.43,140.79 62.12,140.79 63.12,141.79 63.12,153.36 v62.46,154.02 | U2.4 62.39,121.5 59.45,124.44 58.05,124.44 v58,124.5 | v38.5,175.6 EXT2.4 38.5,167.18 D3.3 | v60,175.75 EXT1.4 v60,166.25 | v22.5,139.7 22.1,139.3 v15.8,139.3
SDA  (via drill 0.35, 0.45 pad 0.55)
  Top 0.3: v40.5,175 v62,175 | v61.99,166.65 63.5,165.15 v63.5,155.3 63.5,153.35 63.15,153 37.2,153 22.5,138.3 v22.5,137.8 | v15.8,137.7 10.9,137.7 9.53,136.32 U4.3
  Bottom 0.3: 60.75,126 59.75,126 MCU.P$17 56.81,126.25 55.35,124.79 52.14,124.79 49.4,122.05 49.4,121.28 49.15,121.03 48.34,121.03 U3.3 | v40.5,175 EXT2.3 40.5,167.1 D2.3 | v62,175 EXT1.3 v62,166.66 v61.99,166.65 | 61.5,140.25 DISPLAY.45 | 61.5,140.25 61.5,126.56 60.94,126 60.75,126 | U2.6 62.98,124.25 61.19,124.25 60.75,124.69 60.75,126 | 61.5,140.25 62.25,140.25 63.59,141.59 63.59,155.21 v63.5,155.3 | v22.5,137.8 22.4,137.7 v15.8,137.7
TOUCH_5  (via drill 0.35, 0.45 pad 0.55)
  Top 0.3: v77.7,116.7 72.37,116.7 61.62,127.45 v54.42,127.45
  Bottom 0.3: 3.B 80,114.4 v77.7,116.7 | v54.42,127.45 MCU.P$19
TOUCH_6  (via drill 0.35, 0.45 pad 0.55)
  Top 0.3: v47.5,117.55 47.25,117.8 47.25,124.48 v47.2,124.53
  Bottom 0.3: 2.B 50,114.2 47.5,116.7 v47.5,117.55 | v47.2,124.53 47.2,125.24 47,125.44 47,126.52 47.69,127.21 49.54,127.21 51.38,129.05 51.38,129.55 MCU.P$20
TOUCH_9  (via drill 0.35, 0.45 pad 0.55)
  Top 0.3: v23.5,116.7 24,117.2 36,117.2 38.57,117.2 47.59,126.22 v47.7,126.22 v47.7,126.23
  Bottom 0.3: v23.5,116.7 20,113.2 1.B | v47.7,126.23 47.87,126.23 47.9,126.25 MCU.P$21
TOUCH_10  (via drill 0.35)
  Top 0.3: 1.A 8.86,100 7,101.86 7,117.53 8.47,119 37.59,119 v46.79,128.2 v46.8,128.2
  Bottom 0.3: MCU.P$22 v46.8,128.2
TOUCH_11  (via drill 0.35)
  Top 0.3: 4.A 5.5,76.5 5.5,118 8.3,120.8 36.4,120.8 41.9,126.3 v42.8,126.3
  Bottom 0.3: MCU.P$23 42.8,126.25 v42.8,126.3
TOUCH_12  (via drill 0.35)
  Top 0.3: 7.A 4,48 4,118.5 8.2,122.7 31.7,122.7 37.3,128.3 v41.7,128.3
  Bottom 0.3: MCU.P$24 41.7,129.53 v41.7,128.3
TOUCH_13  (via drill 0.35)
  Top 0.3: v30.3,124.7 8.2,124.7 2.9,119.4 2.9,19.1 ESC.A
  Bottom 0.3: MCU.P$25 37.68,124.75 30.35,124.75 v30.3,124.7
V_BAT  (via drill 0.35)
  Top 0.6: v26.5,133 26.64,132.86 v31.56,132.86
  Bottom 0.6: MCU.P$28 v31.56,132.85 v31.56,132.86 | Q2.3 26.5,135.4 v26.5,133
V_BUS
  Bottom 0.6: Q2.1 29.29,137.14 D1.A 34.18,137.14 R10.2 35.69,136.31 36.64,135.36 MCU.P$26

## Text on the board
tPlace: Schlüsselkasten / Control/Keyboard PCB 1.0
bPlace: + | 5V, 2A | - | Schlüsselkasten / Control/Keyboard PCB 1.0 | PCB #